# EAGLE board TRV_SX1231_V0.1 (EAGLE 6.3)
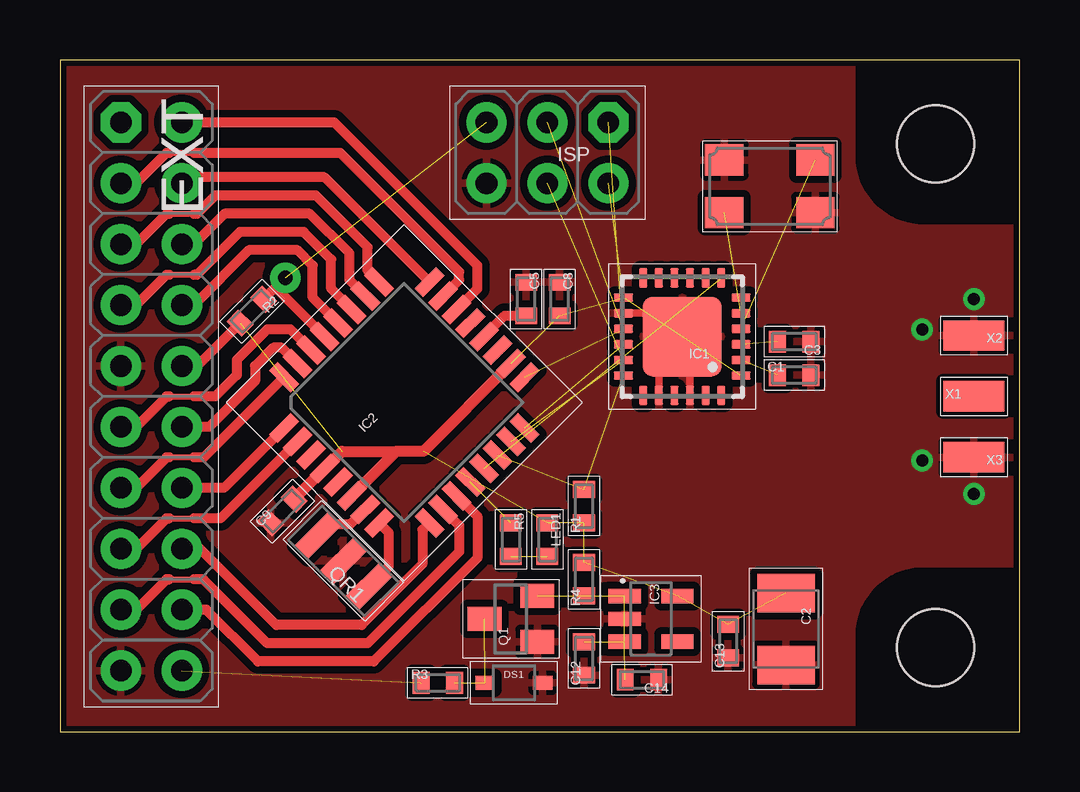
[diagram p0: board, top side]
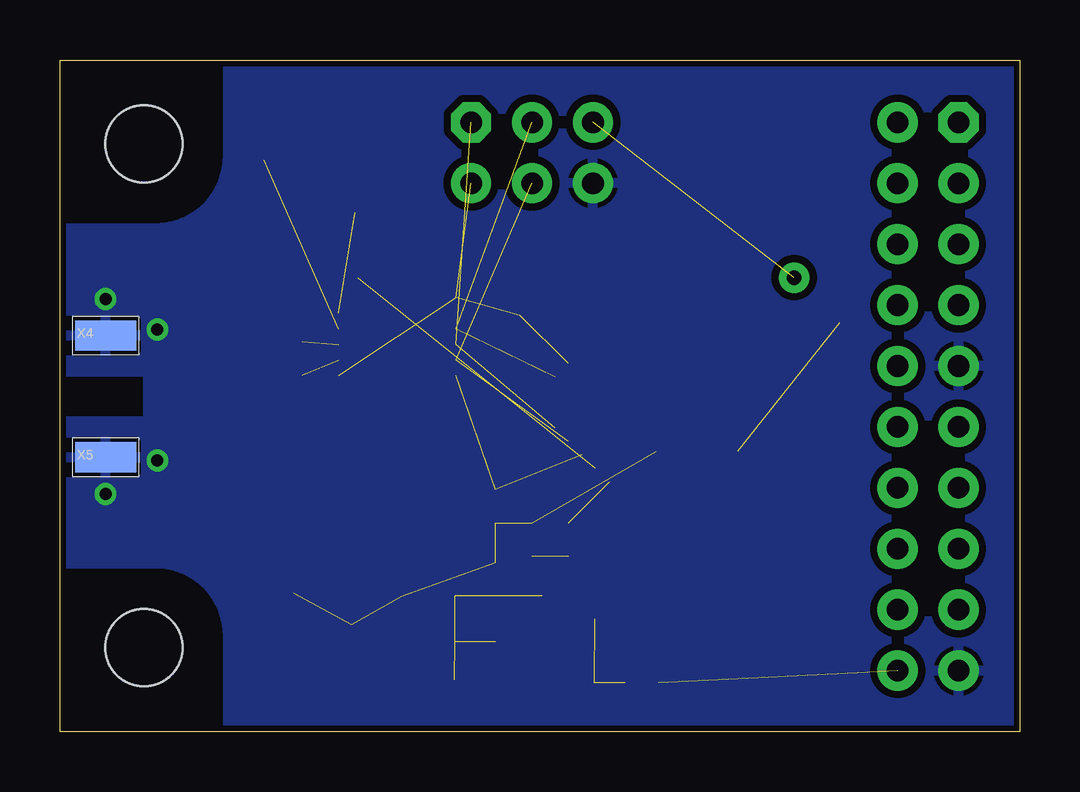
[diagram p1: board, bottom side, seen from below]

Size 40 x 28 mm. Coordinates in mm from the lower left corner, seen from the top.
Outline: 0,0 40,0 40,28 0,28 0,0
Copper layers (1*16): Top 0.035mm / dielectric 1.5mm / Bottom 0.035mm
Design rules "default *": minimum track width 8mil, minimum drill 0.3mm, track to track 12mil, track to pad 12mil, pad to pad 10mil, via to via 12mil, smd to smd 10mil, copper to edge 10mil, drill to drill 8mil, minimum pad ring 5mil, minimum via ring 8mil, stop-mask expansion 4mil, vias tented up to drill 25mil, thermal gap 8mil
Holes 3.2 mm at 36.5,24.5 36.5,3.5

## Footprints (pad centres in the part's own frame; a part is rotated, then mirrored left to right if it is on the bottom)
0603 = smd 0.7 x 0.9: 1 -0.697,0; 2 0.697,0
SMC_B = smd 1.6 x 2.4: + -1.5,0; - 1.5,0
SOD323 = smd 0.8 x 0.6: A 1.2,0; C -1.2,0
ML20S = drill 0.9 pad 1.676 octagon: 1 -11.43,-1.27 | drill 0.9 pad 1.676: 2 -11.43,1.27; 3 -8.89,-1.27; 4 -8.89,1.27; 5 -6.35,-1.27; 6 -6.35,1.27; 7 -3.81,-1.27; 8 -3.81,1.27; 9 -1.27,-1.27; 10 -1.27,1.27; 11 1.27,-1.27; 12 1.27,1.27; 13 3.81,-1.27; 14 3.81,1.27; 15 6.35,-1.27; 16 6.35,1.27; 17 8.89,-1.27; 18 8.89,1.27; 19 11.43,-1.27; 20 11.43,1.27
QFN24 = smd 0.8 x 0.35: 1 -2.45,1.625; 2 -2.45,0.975; 3 -2.45,0.325; 4 -2.45,-0.325; 5 -2.45,-0.975; 6 -2.45,-1.625; 13 2.45,-1.625; 14 2.45,-0.975; 15 2.45,-0.325; 16 2.45,0.325; 17 2.45,0.975; 18 2.45,1.625 | smd 0.35 x 0.8: 7 -1.625,-2.45; 8 -0.975,-2.45; 9 -0.325,-2.45; 10 0.325,-2.45; 11 0.975,-2.45; 12 1.625,-2.45; 19 1.625,2.45; 20 0.975,2.45; 21 0.325,2.45; 22 -0.325,2.45; 23 -0.975,2.45; 24 -1.625,2.45 | smd 3.3 x 3.3: EXP 0,0
TQFP32-08 = smd 1.27 x 0.5: 1 -4.293,2.8; 2 -4.293,2; 3 -4.293,1.2; 4 -4.293,0.4; 5 -4.293,-0.4; 6 -4.293,-1.2; 7 -4.293,-2; 8 -4.293,-2.8; 17 4.293,-2.8; 18 4.293,-2; 19 4.293,-1.2; 20 4.293,-0.4; 21 4.293,0.4; 22 4.293,1.2; 23 4.293,2; 24 4.293,2.8 | smd 0.5 x 1.27: 9 -2.8,-4.293; 10 -2,-4.293; 11 -1.2,-4.293; 12 -0.4,-4.293; 13 0.4,-4.293; 14 1.2,-4.293; 15 2,-4.293; 16 2.8,-4.293; 25 2.8,4.293; 26 2,4.293; 27 1.2,4.293; 28 0.4,4.293; 29 -0.4,4.293; 30 -1.2,4.293; 31 -2,4.293; 32 -2.8,4.293
SOT23-5 = smd 0.6 x 1.35: 1 -0.95,-1.101; 2 0,-1.101; 3 0.95,-1.101; 4 0.95,1.101; 5 -0.951,1.101
ML6S = drill 0.9 pad 1.676 octagon: 1 -2.54,-1.27 | drill 0.9 pad 1.676: 2 -2.54,1.27; 3 0,-1.27; 4 0,1.27; 5 2.54,-1.27; 6 2.54,1.27
SOT23 = smd 1 x 1.4: 1 -0.95,-1.1; 2 0.95,-1.1; 3 0,1.1
ABM3C = smd 1.6 x 1.3: P$1 -1.9,-1.1; P$2 1.9,-1.1; P$3 1.9,1.1; P$4 -1.9,1.1
CR = smd 0.8 x 2: 1 -1.5,0; 2 1.5,0; M 0,0
S2.54/1.27 = smd 1.27 x 2.54: 1 0,0

## Placement (x,y rotation side)
C1  100n  [0603]  30.61,14.86 0 top
C2  10u  [SMC_B]  30.26,4.28 270 top
C3  100n  [0603]  30.61,16.26 180 top
C5  100n  [0603]  19.43,18.03 270 top
C8  100n  [0603]  20.83,18.03 270 top
C9  100n  [0603]  9.27,9.19 45 top
C12  1u  [0603]  21.84,3.05 90 top
C13  1u  [0603]  27.85,3.77 90 top
C14  100n  [0603]  24.26,2.16 180 top
DS1  PESD12VL1BA  [SOD323]  18.92,2.03 0 top
EXT  EXT  [ML20S]  3.81,13.97 270 top
IC1  [QFN24]  25.94,16.47 180 top
IC2  MEGA168PA-AU  [TQFP32-08]  14.35,13.72 45 top
IC3  LP2992-IM5-3.3  [SOT23-5]  24.64,4.7 270 top
ISP  ISP  [ML6S]  20.32,24.13 180 top
LED1  LEDR  [0603]  20.32,8 270 top
Q1  IRLML9301  [SOT23]  18.8,4.7 90 top
QM1  [ABM3C]  29.59,22.73 0 top
QR1  8M  [CR]  11.81,7.11 135 top
R1  10k  [0603]  21.84,9.4 90 top
R2  10k  [0603]  8,17.53 225 top
R3  0R  [0603]  15.75,2.03 0 top
R4  n.b.  [0603]  21.84,6.35 90 top
R5  330R  [0603]  18.8,8 270 top
X1  ANT  [S2.54/1.27]  38.1,13.97 270 top
X2  GND  [S2.54/1.27]  38.1,16.51 90 top
X3  GND  [S2.54/1.27]  38.1,11.43 90 top
X4  GND  [S2.54/1.27]  38.1,16.51 270 bottom
X5  GND  [S2.54/1.27]  38.1,11.43 270 bottom

## Library data of the parts
C1-C3 C5 C8 C9 C12-C14 R1-R5 = RCL
DS1 = Diode
EXT ISP X1-X5 = Conn
IC1 = RF
IC2 = atmel
IC3 = DCDC
LED1 = Optic
Q1 = Transistor
QM1 QR1 = QUARTZ

## Nets
+3V3: C2.+ C8.2 C9.2 C13.2 EXT.10 IC1.1 IC1.13 IC2.4 IC2.6 IC2.18 IC3.5 ISP.2 LED1.1 R1.1 R2.2 R4.2
GND: C1.2 C2.- C3.1 C5.1 C8.1 C9.1 C12.1 C13.1 C14.1 DS1.A EXT.9 EXT.19 IC1.14 IC1.20 IC1.22 IC1.EXP IC2.3 IC2.5 IC2.21 IC3.2 ISP.6 Q1.1 QM1.P$2 QM1.P$4 QR1.M X2.1 X3.1 X4.1 X5.1
MISO: IC1.16 IC2.16 ISP.1
MOSI: IC1.17 IC2.15 ISP.4
N$1: C1.1 IC1.2
N$2: C3.2 IC1.3
N$3: EXT.2 IC2.22
N$4: IC1.5 QM1.P$1
N$5: DS1.C Q1.3 R3.2
N$6: C5.2 IC2.20
N$7: IC2.8 QR1.1
N$8: IC2.7 QR1.2
N$9: EXT.20 R3.1
N$10: IC2.12 R5.1
N$11: IC1.4 QM1.P$3
N$12: C12.2 C14.2 IC3.1 IC3.3 Q1.2 R4.1
N$21: LED1.2 R5.2
PC0: EXT.3 IC2.23
PC1: EXT.4 IC2.24
PC2: EXT.5 IC2.25
PC3: EXT.6 IC2.26
PC4: EXT.7 IC2.27
PC5: EXT.8 IC2.28
PD2: EXT.13 IC2.32
PD3: EXT.14 IC2.1
PD4: EXT.15 IC2.2
PD5: EXT.16 IC2.9
PD6: EXT.17 IC2.10
PD7: EXT.18 IC2.11
RIRQ: IC1.7 IC2.13
RSEL: IC1.18 IC2.14 R1.2
RST: IC2.29 ISP.5 R2.1
RXD: EXT.11 IC2.30
SCK: IC1.15 IC2.17 ISP.3
TXD: EXT.12 IC2.31

## Tracks (layer width: path | path; a pad name or v marks a point on that pad's centre or on a via)
+3V3  (11 unrouted)
  Top 0.406: C9.2 | R2.2 5.71,15.24 EXT.10
  Top 0.457: C9.2 IC2.4 11.75,11.68 14.02,11.68 | IC2.6 14.02,11.68 | IC2.18 15.15,11.68 14.02,11.68
GND  (via drill 0.5)
  Top 0.305: IC1.14 24.51,17.44 | IC1.20 24.96,15.09 | IC1.22 26.26,16.14 IC1.EXP
  other vias: 38.1,18.03 38.1,9.91 35.94,11.3 35.94,16.76
  pour Top: 0,0 33,0 33,4 arc-90 36,7 40,7 40,21 36,21 arc-90 33,24 33,28 0,28
  pour Bottom: 0,0 33,0 33,4 arc-90 36,7 40,7 40,12.95 36.32,12.95 36.32,14.99 40,14.99 40,21 36,21 arc-90 33,24 33,28 0,28
MISO  (2 unrouted)
MOSI  (2 unrouted)
N$1  (1 unrouted)
N$2  (1 unrouted)
N$3
  Top 0.406: IC2.22 17.4,18.46 17.4,19.43 11.43,25.4 EXT.2
N$4  (1 unrouted)
N$5  (2 unrouted)
N$6
  Top 0.406: IC2.20 18.54,17.34 C5.2
N$7
  Top 0.406: IC2.8 13.72,8.28 13.72,6.9 QR1.1
N$8
  Top 0.406: IC2.7 12.1,8.64 11.3,8.64 10.84,8.17 QR1.2
N$9  (1 unrouted)
N$10  (1 unrouted)
N$11  (1 unrouted)
N$12  (5 unrouted)
N$21  (1 unrouted)
PC0
  Top 0.254: 4.57,24.13 5.59,24.13
  Top 0.406: IC2.23 16.64,18.83 16.64,19.18 11.68,24.13 5.59,24.13 | EXT.3 3.17,22.86 4.45,24.13 4.57,24.13
PC1
  Top 0.406: IC2.24 11.02,23.11 5.33,23.11 EXT.4
PC2
  Top 0.254: 4.57,21.59 5.59,21.59
  Top 0.406: EXT.5 3.17,20.32 4.45,21.59 4.57,21.59 | IC2.25 12.83,19.2 12.83,20.19 10.67,22.35 6.48,22.35 5.71,21.59 5.59,21.59
PC3
  Top 0.406: IC2.26 12.06,18.83 12.06,19.94 10.41,21.59 6.86,21.59 5.59,20.32 EXT.6
PC4
  Top 0.254: 4.57,19.05 5.59,19.05
  Top 0.406: EXT.7 3.17,17.78 4.45,19.05 4.57,19.05 | IC2.27 11.3,18.46 11.3,19.68 10.16,20.83 7.49,20.83 5.71,19.05 5.59,19.05
PC5
  Top 0.406: IC2.28 10.54,18.09 10.54,19.43 9.91,20.07 7.87,20.07 5.59,17.78 EXT.8
PD2
  Top 0.254: 5.59,11.43 4.57,11.43
  Top 0.406: EXT.13 3.17,10.16 4.45,11.43 4.57,11.43 | IC2.32 5.99,11.43 5.59,11.43
PD3
  Top 0.406: IC2.1 6.83,10.16 EXT.14
PD4
  Top 0.254: 4.57,8.89 5.59,8.89
  Top 0.406: EXT.15 3.17,7.62 4.45,8.89 4.57,8.89 | IC2.2 6.7,8.89 5.59,8.89
PD5
  Top 0.406: IC2.9 15.11,8.41 15.11,6.99 12.57,4.45 9.02,4.45 5.84,7.62 EXT.16
PD6
  Top 0.254: 4.57,6.35 5.59,6.35
  Top 0.406: IC2.10 16.64,8.6 16.64,7.49 12.83,3.68 8.64,3.68 5.97,6.35 5.59,6.35 | EXT.17 3.17,5.08 4.45,6.35 4.57,6.35
PD7
  Top 0.406: IC2.11 17.4,8.97 17.4,7.24 13.08,2.92 8.26,2.92 6.1,5.08 EXT.18
RIRQ  (1 unrouted)
RSEL  (2 unrouted)
RST  (via drill 0.6 pad 1.27)  (1 unrouted)
  Top 0.406: R2.1 9.02,18.54 | 9.02,18.54 v9.4,18.92 | IC2.29 9.02,18.48 9.02,18.54
RXD
  Top 0.254: 4.57,13.97 5.59,13.97
  Top 0.406: EXT.11 3.17,12.7 4.45,13.97 4.57,13.97 | IC2.30 9.61,16.76 8.64,16.76 7.37,15.49 7.37,14.86 6.48,13.97 5.59,13.97
SCK  (2 unrouted)
TXD
  Top 0.406: IC2.31 9.24,16 8.89,16 8.13,15.24 8.13,14.61 6.22,12.7 EXT.12